# EAGLE board Hauptplatine_v_1_0 (EAGLE 7.3.0)
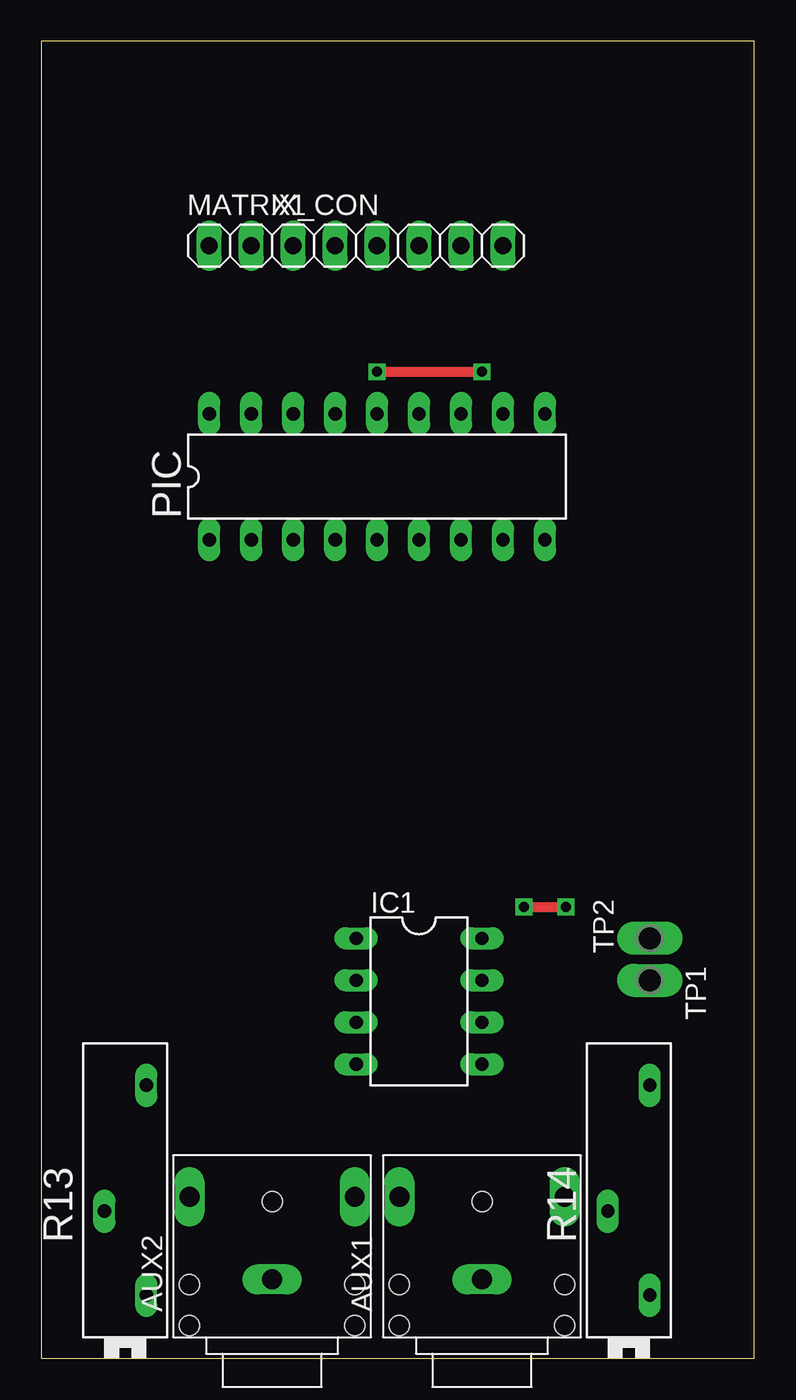
[diagram p0: board, top side]
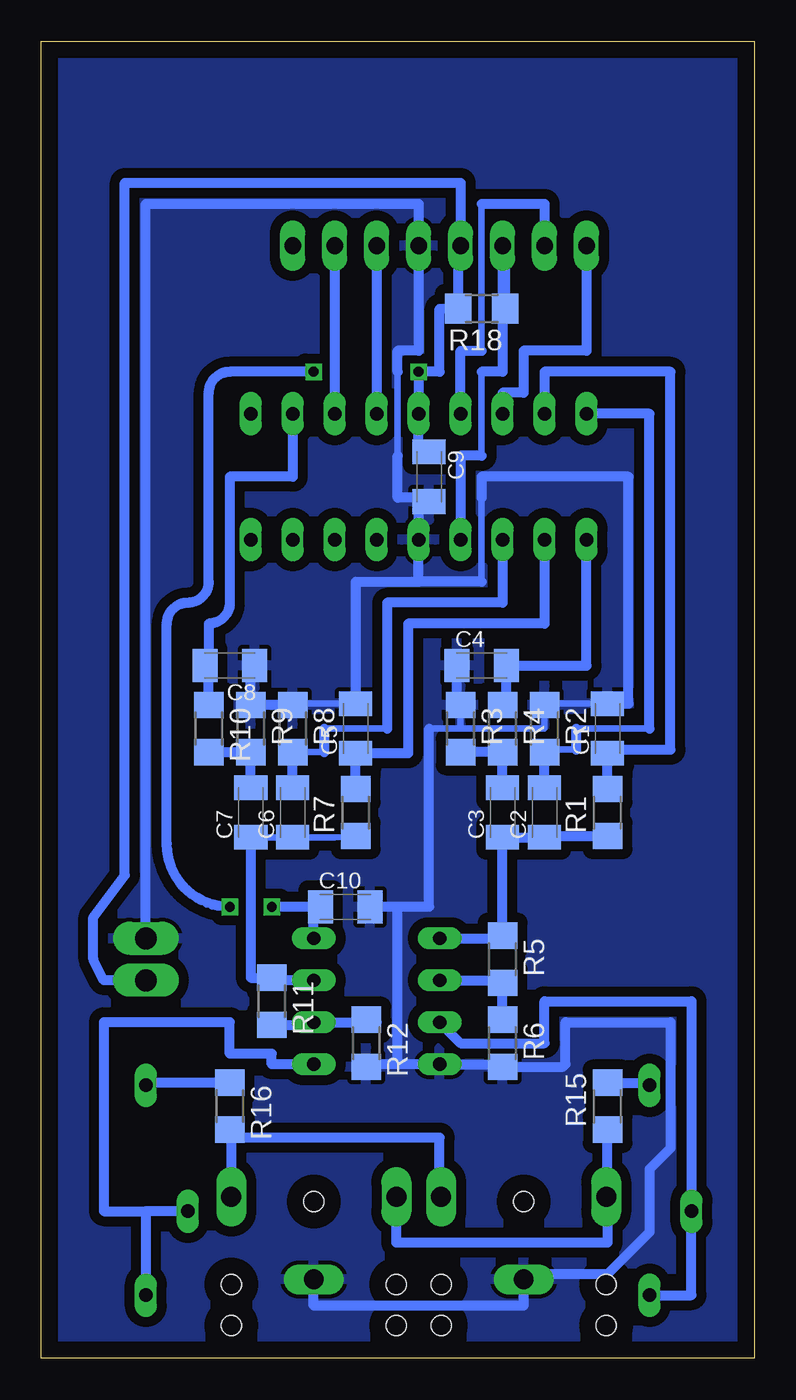
[diagram p1: board, bottom side, seen from below]

Size 43.16 x 79.68 mm. Coordinates in mm from the lower left corner, seen from the top.
Outline: 0,0 43.16,0 43.16,79.68 0,79.68 0,0
Copper layers (1*16): Top 0.035mm / dielectric 1.5mm / Bottom 0.035mm
Design rules "default": minimum track width 10mil, minimum drill 24mil, track to track 8mil, track to pad 8mil, pad to pad 8mil, via to via 8mil, smd to smd 8mil, copper to edge 40mil, drill to drill 8mil, minimum pad ring 10mil, minimum via ring 8mil, stop-mask expansion 4mil, vias tented up to drill 0mil, thermal gap 10mil

## Footprints (pad centres in the part's own frame; a part is rotated, then mirrored left to right if it is on the bottom)
KLB3MM5 = drill 1.2 long: P1 3.5,0; P2 8.5,-5; P3 8.5,5 | hole 1.2: 0.7,5; 3.2,5; 3.2,-5; 8.2,0; 0.7,-5
C1206 = smd 1.5 x 2: 1 -1.5,0; 2 1.5,0
DIL08 = drill 0.813 pad 1.27 long: 1 -3.81,-3.81; 2 -1.27,-3.81; 3 1.27,-3.81; 4 3.81,-3.81; 5 3.81,3.81; 6 1.27,3.81; 7 -1.27,3.81; 8 -3.81,3.81
1X02 = drill 1.016 long: 1 -1.27,0; 2 1.27,0
DIL18 = drill 0.813 long: 1 -10.16,-3.81; 2 -7.62,-3.81; 3 -5.08,-3.81; 4 -2.54,-3.81; 5 0,-3.81; 6 2.54,-3.81; 7 5.08,-3.81; 8 7.62,-3.81; 9 10.16,-3.81; 10 10.16,3.81; 11 7.62,3.81; 12 5.08,3.81; 13 2.54,3.81; 14 0,3.81; 15 -2.54,3.81; 16 -5.08,3.81; 17 -7.62,3.81; 18 -10.16,3.81
R_SMD1206 = smd 1.6 x 1.803: 1 -1.422,0; 2 1.422,0
PT-SPIN = drill 0.813 long: A -6.35,-1.27; E 6.35,-1.27; S -1.27,1.27
P1-13Y = drill 1.321 pad 1.905 long: TP 0,0
1X06 = drill 1.016 long: 1_MCLR/VPP -6.35,0; 2_VDD -3.81,0; 3_VSS -1.27,0; 4_PGD 1.27,0; 5_PGC 3.81,0; 6_LVP 6.35,0

## Placement (x,y rotation side)
AUX1  1501_03KLB3MM5  [KLB3MM5]  26.67,1.27 90 top
AUX2  1501_03KLB3MM5  [KLB3MM5]  13.97,1.27 90 top
C1  470n  [C1206]  8.89,38.1 90 bottom
C2  68n  [C1206]  12.7,33.02 90 bottom
C3  470n  [C1206]  15.24,33.02 90 bottom
C4  68n  [C1206]  16.51,41.91 0 bottom
C5  470n  [C1206]  24.13,38.1 90 bottom
C6  68n  [C1206]  27.94,33.02 90 bottom
C7  470n  [C1206]  30.48,33.02 90 bottom
C8  68n  [C1206]  31.75,41.91 180 bottom
C9  22n  [C1206]  19.69,53.34 270 bottom
C10  22n  [C1206]  24.77,27.3 0 bottom
IC1  LM4558N  [DIL08]  22.86,21.59 270 top
MATRIX_CON  [1X02]  11.43,67.31 0 top
PIC  PIC16F1826/27P  [DIL18]  20.32,53.34 0 top
R1  1k  [R_SMD1206]  8.89,33.02 90 bottom
R2  1k  [R_SMD1206]  12.7,38.1 270 bottom
R3  1k  [R_SMD1206]  17.78,38.1 270 bottom
R4  1k  [R_SMD1206]  15.24,38.1 270 bottom
R5  10k  [R_SMD1206]  15.24,24.13 270 bottom
R6  8k2  [R_SMD1206]  15.24,19.05 270 bottom
R7  1k  [R_SMD1206]  24.13,33.02 90 bottom
R8  1k  [R_SMD1206]  27.94,38.1 270 bottom
R9  1k  [R_SMD1206]  30.48,38.1 270 bottom
R10  1k  [R_SMD1206]  33.02,38.1 270 bottom
R11  10k  [R_SMD1206]  29.21,21.59 270 bottom
R12  8k2  [R_SMD1206]  23.49,19.05 270 bottom
R13  10k  [PT-SPIN]  5.08,10.16 90 top
R14  10k  [PT-SPIN]  35.56,10.16 90 top
R15  1k  [R_SMD1206]  8.89,15.24 90 bottom
R16  1k  [R_SMD1206]  31.75,15.24 270 bottom
R18  47k  [R_SMD1206]  16.51,63.5 180 bottom
TP1  TPPAD1-13Y  [P1-13Y]  36.83,22.86 270 top
TP2  TPPAD1-13Y  [P1-13Y]  36.83,25.4 90 top
X1  0  [1X06]  21.59,67.31 0 top

## Library data of the parts
AUX1 AUX2 = stehlik-spezial
C1-C10 R1-R16 = htl3r-discrete
IC1 = linear
MATRIX_CON = pinhead
PIC = microchip
R18 = htl3r-discrete-1
TP1 TP2 = testpad
X1 = htl3r-PICs

## Nets
+5V: C9.1 C10.1 IC1.8 PIC.14 R18.2 TP1.TP X1.2_VDD
AUX_IN_2: IC1.5 R14.A R14.S
GND: AUX1.P1 AUX2.P1 C1.2 C4.1 C5.2 C8.1 C9.2 C10.2 IC1.4 PIC.5 R2.1 R3.1 R6.2 R8.1 R9.1 R12.2 TP2.TP X1.3_VSS
N$1: C3.2 R3.2 R4.2
N$2: PIC.4 R18.1 X1.1_MCLR/VPP
N$3: MATRIX_CON.2 PIC.15
N$4: IC1.2 R5.2 R6.1
N$5: MATRIX_CON.1 PIC.16
N$6: C4.2 PIC.1 R4.1
N$7: R13.E R15.2
N$8: C7.2 R9.2 R10.2
N$9: C8.2 PIC.11 R10.1
N$10: IC1.6 R11.2 R12.1
N$14: R14.E R16.1
N$15: IC1.3 R13.A R13.S
N$16: AUX1.P2 AUX2.P2 R16.2
N$17: AUX1.P3 AUX2.P3 R15.1
PGC: PIC.12 X1.5_PGC
PGD: PIC.13 X1.4_PGD
WHATEVER: C2.1 C3.1 IC1.1 R1.1 R5.1
WHATEVER1: C1.1 PIC.17 R1.2
WHATEVER2: C2.2 PIC.18 R2.2
WHATEVER3: C5.1 PIC.2 R7.2
WHATEVER4: C6.1 C7.1 IC1.7 R7.1 R11.1
WHATEVER5: C6.2 PIC.3 R8.2

## Tracks (layer width: path | path; a pad name or v marks a point on that pad's centre or on a via)
+5V  (via drill 0.6)
  Top 0.61: v29.21,27.3 v31.75,27.3 | v20.32,59.69 v26.67,59.69
  Bottom 0.406: 20.32,54.84 C9.1
  Bottom 0.61: IC1.8 26.67,26.67 26.27,26.67 C10.1 v29.21,27.3 | 20.32,54.84 PIC.14 v20.32,59.69 19.05,59.69 19.05,63.5 R18.2 17.93,67.31 X1.2_VDD 17.78,71.12 38.1,71.12 38.1,29.21 40.01,26.67 40.01,24.13 39.37,22.86 TP1.TP | v31.75,27.3 arc90 35.56,31.12 35.56,44.45 arc90 34.29,45.72 arc-90 33.02,46.99 33.02,58.42 arc90 31.75,59.69 v26.67,59.69
AUX_IN_2
  Bottom 0.61: R14.S 36.83,8.89 | 36.83,8.89 R14.A | IC1.5 29.21,17.78 29.21,18.41 31.75,18.41 31.75,20.32 39.37,20.32 39.37,8.89 36.83,8.89
GND
  Bottom 0.406: C1.2 12.7,39.6 R2.1 12.7,38.1 17.78,38.1 | 18.01,39.52 R3.1 17.78,38.1 | R8.1 27.94,39.6 C5.2 | C9.2 20.32,52.07 | C5.2 24.13,39.37 | 23.49,39.6 C5.2 | 19.69,38.1 17.78,38.1 | 21.59,54.61 21.59,59.69 | 16.51,52.07 16.51,46.99
  Bottom 0.61: 21.59,17.78 IC1.4 15.24,17.78 R6.2 11.58,17.63 11.43,17.78 11.43,20.32 5.08,20.32 5.08,12.7 6.35,11.43 6.35,7.62 8.89,5.08 13.66,5.08 AUX2.P1 | 21.59,17.78 22.86,17.78 R12.2 | 22.86,26.67 22.86,27.3 C10.2 21.59,27.3 | AUX2.P1 13.97,5.08 | AUX2.P1 13.97,3.18 26.67,3.18 AUX1.P1 | 19.69,38.1 19.69,27.3 21.59,27.3 | 21.59,17.78 21.59,27.3 | 18.01,39.52 C4.1 | 21.59,54.61 21.59,52.07 20.32,52.07 PIC.5 20.32,46.99 | 21.59,59.69 21.59,60.96 20.32,60.96 X1.3_VSS 20.32,69.85 36.83,69.85 TP2.TP | C5.2 24.13,46.99 20.32,46.99 | 16.51,52.07 16.51,53.34 7.62,53.34 7.62,39.6 C1.2 | 16.51,46.99 20.32,46.99 | R8.1 R9.1 30.48,41.91 C8.1
  pour Bottom (isolate 0.61): -1.27,81.28 45.72,81.28 45.72,-1.27 -1.27,-1.27
N$1
  Bottom 0.61: C3.2 R4.2 R3.2
N$2
  Bottom 0.406: 16.51,59.69 16.51,54.61
  Bottom 0.61: R18.1 15.09,67.31 X1.1_MCLR/VPP 15.24,59.69 16.51,59.69 | 16.51,54.61 17.78,54.61 PIC.4
N$3
  Bottom 0.406: 16.51,60.96 16.51,69.85
  Bottom 0.61: PIC.15 17.78,60.96 16.51,60.96 | 16.51,69.85 12.7,69.85 MATRIX_CON.2
N$4
  Bottom 0.61: R6.1 R5.2 15.24,22.86 IC1.2
N$5
  Bottom 0.61: MATRIX_CON.1 10.16,60.96 13.97,60.96 13.97,59.69 13.97,58.42 15.24,58.42 PIC.16
N$6
  Bottom 0.406: 15.01,39.52 R4.1
  Bottom 0.61: 15.01,39.52 C4.2 10.16,41.91 PIC.1
N$7
  Bottom 0.61: R15.2 6.35,16.66 R13.E
N$8
  Bottom 0.61: R10.2 R9.2 C7.2
N$9
  Bottom 0.61: PIC.11 27.94,53.34 31.75,53.34 31.75,45.72 arc90 33.02,44.45 33.02,42.14 arc90 C8.2 33.02,41.91 R10.1
N$10
  Bottom 0.61: R12.1 22.86,20.32 IC1.6 26.67,20.17 R11.2
N$14
  Bottom 0.61: R16.1 36.83,16.66 R14.E
N$15
  Bottom 0.61: R13.A 3.81,3.81 R13.S 3.81,21.59 12.7,21.59 12.7,19.05 17.78,19.05 IC1.3
N$16
  Bottom 0.61: AUX2.P2 19.05,9.77 19.05,13.34 31.67,13.34 | R16.2 31.75,13.34 31.67,13.34 | 31.67,13.34 AUX1.P2
N$17
  Bottom 0.61: 8.89,9.77 R15.1 | AUX2.P3 8.89,9.77 | 8.89,9.77 8.89,6.98 21.67,6.98 AUX1.P3
PGC
  Bottom 0.61: X1.5_PGC PIC.12
PGD
  Bottom 0.61: X1.4_PGD PIC.13
WHATEVER
  Bottom 0.406: C2.1 12.7,31.6
  Bottom 0.61: C2.1 C3.1 R5.1 15.24,25.4 IC1.1 | 12.7,31.6 R1.1
WHATEVER1
  Bottom 0.61: R1.2 C1.1 8.89,36.83 5.08,36.83 5.08,59.69 12.7,59.69 PIC.17
WHATEVER2
  Bottom 0.406: R2.2 12.7,36.83 10.79,36.83 | 10.79,38.1 6.35,38.1
  Bottom 0.61: C2.2 R2.2 | 10.79,38.1 10.79,36.83 | 6.35,38.1 6.35,57.15 PIC.18
WHATEVER3
  Bottom 0.61: R7.2 C5.1 20.95,36.6 20.95,44.45 12.7,44.45 PIC.2
WHATEVER4
  Bottom 0.406: R7.1 25.4,31.52 C6.1 C7.1
  Bottom 0.61: IC1.7 29.21,22.86 R11.1 30.48,23.01 C7.1
WHATEVER5
  Bottom 0.406: R8.2 26.03,36.68 | 26.03,38.1 22.23,38.1
  Bottom 0.61: C6.2 R8.2 | PIC.3 15.24,45.72 22.23,45.72 22.23,38.1 | 26.03,38.1 26.03,36.68